# Altium PCB 串口版.PcbDoc
Units mm, origin at the board's own origin, x right, y up, seen from the top; angles counter-clockwise.
Board outline 15.01 x 20 mm, 2 copper layers (Top Layer, Bottom Layer); 13 components, 15 nets, 58 pads, 12 vias.
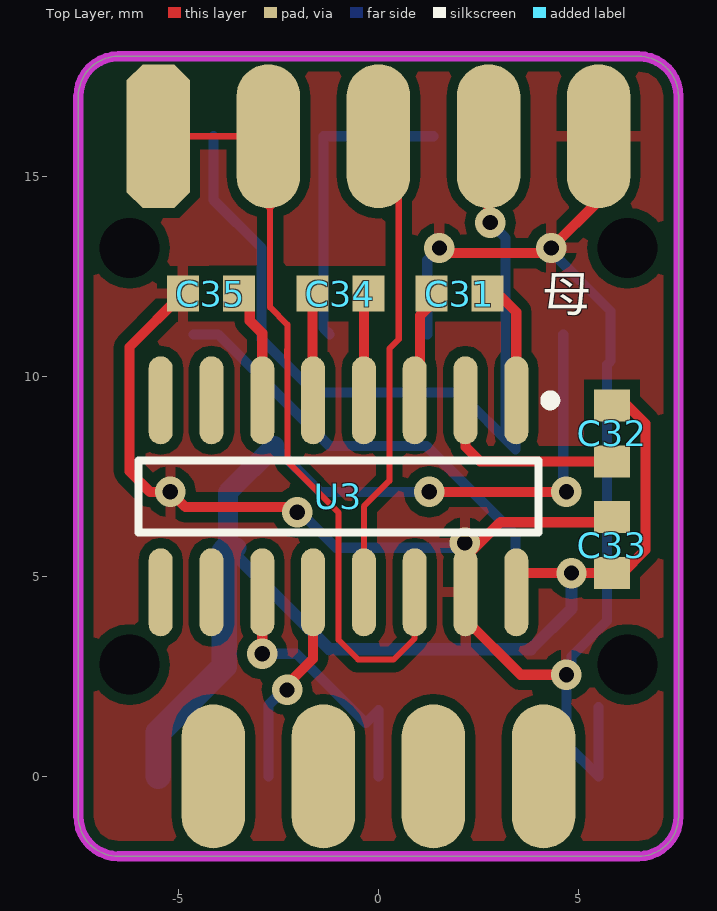
[diagram p0: Top Layer view]
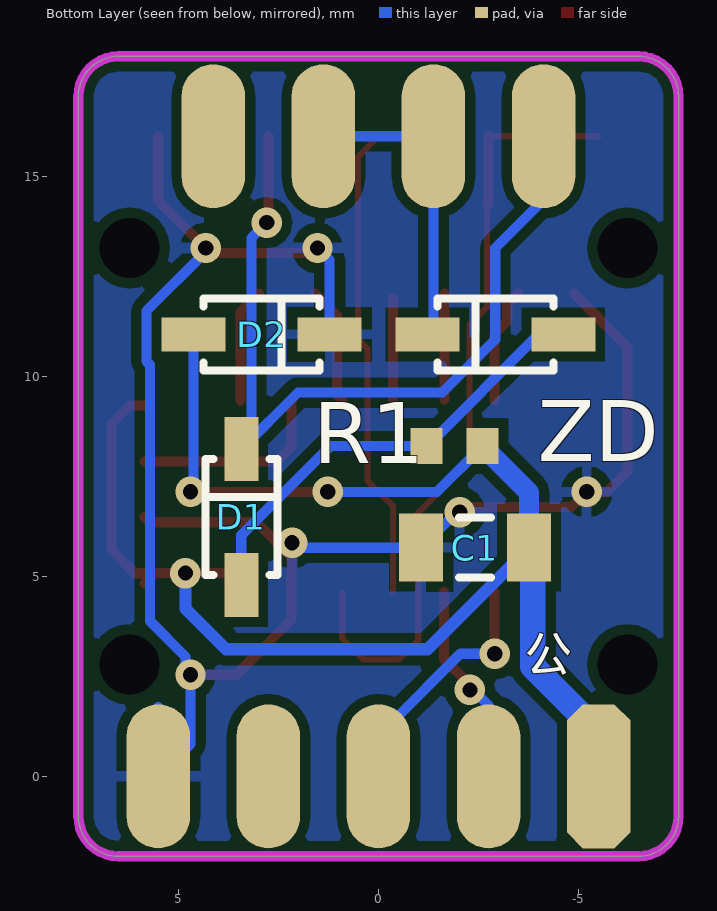
[diagram p1: Bottom Layer view, seen from below]

## Layer stack, top to bottom
Top Layer: signal copper 0.0356
Dielectric: dielectric 0.32, FR-4, Dk 4.8
Bottom Layer: signal copper 0.0356

## Board outline
-7.502,-1 ccw(c-6.502,-1) -6.502,-2 6.502,-2 ccw(c6.502,-1) 7.502,-1 7.503,-1 7.503,17 7.502,17 ccw(c6.502,17) 6.502,18 -6.502,18 ccw(c-6.502,17) -7.502,17 -7.503,17

## Design rules (kind name [scope] priority, off if disabled: settings)
Clearance [All] p1: gap=0.254
PolygonConnect [All] p1: connectstyle=Relief reliefconductorwidth=0.254 reliefentries=4 polygonreliefangle="90 Angle"
RoomDefinition 串口板 [InComponentClass('串口板')] p1: confinementstyle=ConfineIn formatcopy=TRUE outline -6.985,-2.159 6.985,-2.159 6.985,18.161 -6.985,18.161
RoutingVias [All] p1: holewidth=0.711 width=1.27 viastyle="Through Hole" minholewidth=0.203 minwidth=0.254 maxholewidth=0.711 maxwidth=1.27
SilkscreenOverComponentPads [All] p1: minsilkscreentomaskgap=0.254
SolderMaskExpansion [All] p1: expansion=0.102
Width [All] p1: maxlimit=2.54 minlimit=0.152 preferedwidth=0.254
27 further rules are at their usual default settings.

## Components (designator, comment, footprint, x,y, rotation, side; value= is the part's Value field where it differs from the comment)
C1 "Cap Pol1" C1206 -2.413,5.715 r0 bottom
C31 "0.1uF" 1608[0603] 2.032,12.065 r180 top
C32 "0.1uF" 1608[0603] 5.842,8.571 r90 top
C33 "0.1uF" 1608[0603] 5.842,5.777 r90 top
C34 "0.1uF" 1608[0603] -0.953,12.065 r180 top
C35 "0.1uF" 1608[0603] -4.191,12.065 r0 top
D1 "Diode 1N4148" 425 3.429,6.477 r270 bottom
D2 "D Zener" 425 2.921,11.049 r0 bottom
R1 "Res2" 1608[0603] -1.905,8.255 r180 bottom
U3 "MAX232ESE" SOIC16_N -1,7 r270 top
ZD "Diode 1N4148" 425 -2.921,11.049 r180 bottom (schematic designator D3)
公 "DB9" DB9BSM -5.503,0 r0 bottom locked (schematic designator J2)
母 "DB9" DB9BSM -5.503,16.002 r0 top locked (schematic designator J1)

## Footprints (in the part's own frame and the unit in brackets; to place one, negate y for a bottom-side part, rotate by r counter-clockwise, add the part's x,y. Pads: shape width x height; smd on the part's side, far side on the other; paste and mask are expansions set on the pad)
425 [mm] "SOD-123; 2 Leads; Body 2.7 x 1.6 mm, (Lx"
  rect 1.6x0.85 smd: 1(-1.7,0) 2(1.7,0)
  silkscreen extent -1.45,-0.9 1.45,0.9
1608[0603] [mm] "Chip Capacitor, Body 1.6x0.8mm, IPC High Densi"
  rect 0.8x0.9 smd: 1(-0.7,0) 2(0.7,0)
  body extent -0.87,-0.48 0.87,0.48, height 1.3
C1206 [mm] "Chip Capacitor, Body 3.2x1.6mm, IPC High Densi"
  rect 1.1x1.7 smd: 1(-1.35,0) 2(1.35,0)
  silkscreen extent -0.4,-0.75 0.4,0.75, body extent -1.7,-0.9 1.7,0.9, height 1.3
DB9BSM [mil]
  oct 62.5x141.67 smd: 1(0,0)
  oval 62.5x141.67 smd: 2(108.33,0) 3(216.67,0) 4(325,0) 5(433.33,0)
  oval 62.5x141.67 smd far side: 6(54.17,0) 7(162.5,0) 8(270.83,0) 9(379.17,0)
SOIC16_N [mm] "SOIC, 16-Leads, Body 9.9x3.9mm, Pitch 1.27mm, IPC Medium Densi"
  oval 2.2x0.6 smd: 1(-2.4,4.445) 2(-2.4,3.175) 3(-2.4,1.905) 4(-2.4,0.635) 5(-2.4,-0.635) 6(-2.4,-1.905) 7(-2.4,-3.175) 8(-2.4,-4.445) 9(2.4,-4.445) 10(2.4,-3.175) 11(2.4,-1.905) 12(2.4,-0.635) 13(2.4,0.635) 14(2.4,1.905) 15(2.4,3.175) 16(2.4,4.445)
  silkscreen extent -2.52,-5 0.9,5.42, body extent -2,-5 2,5, height 1.91

## Part data
C1: "Polarized Capacitor (Radial)"
C31 C32 C33 C34 C35: library part CAP, "Capacitor"
D1 ZD: "High Conductance Fast Diode"
D2: "Zener Diode"
R1: "Resistor"
U3: "+5V Powered, Multi-Channel RS-232 Driver/Receiver"

## Free pads (board coordinates)
  round 1 hole 1.5 unplated: 0(-6.223,2.794) 0(-6.223,13.208) 0(6.223,2.794) 0(6.223,13.208)

## Via types
v1: diameter 0.762, hole 0.381, Top Layer to Bottom Layer, 7 vias
v2: diameter 0.762, hole 0.381, Top Layer to Bottom Layer, tented both sides, 5 vias

## Nets (pads, with @x,y where several pads share a name; then routed paths per layer and width w, separated by ;. In a path a pad name is that pad's centre, name@x,y a point inside that pad or via, vN(x,y) a via of type N, cw(c..) or ccw(c..) an arc to the next point about the centre after c; other vN are vias at no path point)
GND: C1.2 C33.2 C35.1 D2.1 U3.15 公.5 母.5 | length 48
  Top Layer w0.254: C35.1 -6.223,10.733 -6.223,7.62 -5.715,7.112 v2(-5.207,7.112) -4.826,6.731 -2.032,6.731 v2(-2.032,6.604) v2@-2.032,6.477 ; v2(1.524,13.208) 1.651,13.081 4.191,13.081 v1(4.318,13.208) 5.503,14.393 母.5 ; v1(4.699,2.54) 3.556,2.54 2.175,3.921 U3.15 2.175,5.477 3.048,6.35 5.715,6.35 C33.2
  Bottom Layer w0.254: v2(-2.032,6.604) -1.905,6.477 -1.825,6.477 C1.2 2.032,5.715 v1(2.159,5.842) ; D2.1 1.221,12.905 v2(1.524,13.208) ; v1(4.318,13.208) 4.318,13.116 5.802,11.632 5.802,10.379 5.715,10.292 5.715,3.885 4.826,2.996 v1@4.826,2.413 ; v1(4.699,2.54) 4.699,0.804 公.5 公.5@5.503,1.736
NetC31_1: C31.1 U3.1 | length 2.9
  Top Layer w0.254: C31.1@2.986,12.065 3.445,11.606 U3.1
NetC31_2: C31.2 U3.3 | length 2.9
  Top Layer w0.254: U3.3 1.037,9.532 1.037,11.516 C31.2@1.586,12.065
NetC32_1: C32.1 U3.2 | length 5
  Top Layer w0.254: U3.2 2.175,8.239 2.54,7.874 5.839,7.874 C32.1
NetC34_1: C34.1 U3.4 | length 2.6
  Top Layer w0.254: U3.4 C34.1@-0.365,11.953
NetC34_2: C34.2 U3.5 | length 2.6
  Top Layer w0.254: U3.5@-1.653,9.418 -1.651,9.419 C34.2 C34.2
NetC35_2: C35.2 U3.6 | length 2.9
  Top Layer w0.254: C35.2 -3.218,11.792 -3.218,11.39 -2.905,11.077 U3.6
NetD1_1: D1.1 母.4 母.6 | length 21.2
  Top Layer w0.254: 母.4 2.752,13.885 v1(2.794,13.843)
  Bottom Layer w0.254: 母.6 -4.127,14.414 -2.921,13.208 -2.921,10.922 -1.593,9.594 2.012,9.594 D1.1 3.429,8.509 3.175,8.763 3.175,13.462 v1(2.794,13.843)
NetD1_2: D1.2 R1.1 ZD.2 | length 11.4
  Bottom Layer w0.254: ZD.2 -4.01,11.049 R1.1@-1.216,8.255 ; R1.1@-1.221,8.271 R1.1 1.205,8.255 3.429,6.031 D1.2
NetD3_1: ZD.1 母.7 母.8 | length 7.8
  Bottom Layer w0.254: ZD.1 -1.376,11.204 母.7 母.8
RX: U3.14 母.1 母.2 | length 21.5
  Top Layer w0.152: 母.1 母.2 -2.71,15.96 -2.71,14.267 -2.71,11.727 -2.275,11.292 -2.275,10.461 ; -2.286,10.668 -2.286,10.472 -2.275,10.461 ; U3.14 0.905,3.445 0.381,2.921 -0.508,2.921 -0.995,3.408 -0.995,6.595 -2.275,7.874 -2.275,10.461
  Top Layer w0.254: 母.2 -2.752,14.309 母.2@-2.71,14.267
RXD0: U3.12 公.2 | length 5.2
  Top Layer w0.254: v2(-2.286,2.159) -2.266,2.179 -2.266,2.306 -1.635,2.937 U3.12
  Bottom Layer w0.254: 公.2 -2.752,1.781 -2.286,2.246 v2(-2.286,2.159)
TX: U3.13 母.3 | length 12
  Top Layer w0.152: U3.13 -0.365,6.747 0.275,7.387 0.275,10.694 0.508,10.927 0.508,15.494 母.3
TXD0: U3.11 公.3 | length 6.9
  Top Layer w0.254: v2(-2.905,3.064) U3.11
  Bottom Layer w0.254: v2(-2.905,3.064) -2.048,3.064 -0.318,1.333 0,1.651 公.3
VDD5V: C1.1 C32.2 C33.1 D2.2 R1.2 U3.16 公.1 | length 40.1
  Top Layer w0.254: v1(1.27,7.112) v1(4.699,7.112) ; U3.16@3.429,5.08 v1(4.826,5.08) 5.585,5.08 C33.1@5.842,4.823 ; C33.1 6.093,5.077 6.673,5.657 6.673,8.821 6.223,9.271 C32.2
  Bottom Layer w0.254: R1.2 -1.462,7.112 v1(1.27,7.112) ; D2.2 4.621,7.19 v1(4.699,7.112)
  Bottom Layer w0.305: C1.1 -1.223,3.175 3.81,3.175 4.826,4.191 v1(4.826,5.08)
  Bottom Layer w0.508: C1.1@-3.556,5.715 C1.1 -3.763,7.097 R1.2
  Bottom Layer w0.635: 公.1 -5.503,1.101 -3.858,2.746 -3.858,5.62 C1.1
pads on no net: U3.7 U3.8 U3.9 U3.10 公.4 公.6 公.7 公.8 公.9 母.9

## Polygon pours and split planes (outlines as drawn)
GND on Top Layer "Top Layer-No Net" (solid): -7.722,18.212 -7.645,18.288 7.468,18.288 7.468,-1.905 7.112,-2.261 -7.823,-2.261 -7.823,18.136 -7.722,18.237
GND on Bottom Layer "Top Layer-No Net" (solid, pour order 11): -7.017,18.491 7.645,18.491 7.645,-2.21 7.526,-2.337 -7.544,-2.337 -7.544,17.907 -7.017,18.466

## Keep-outs
Keep-Out Layer:
  lines w0.254: 7.502,-1 cw(c6.502,-1) 6.502,-2 -6.502,-2 cw(c-6.502,-1) -7.502,-1 -7.503,17 cw(c-6.502,17) -6.502,18 6.502,18 cw(c6.502,17) 7.502,17 ; 7.503,-1 7.503,17

## Silkscreen, mask and mechanical layers (free items; w line width, h text height)
Mechanical 1:
  lines w0.254: 7.502,-1 cw(c6.502,-1) 6.502,-2 -6.502,-2 cw(c-6.502,-1) -7.502,-1 -7.503,17 cw(c-6.502,17) -6.502,18 6.502,18 cw(c6.502,17) 7.502,17 ; 7.503,-1 7.503,17